# Altium PCB call-2014-06.PcbDoc (part 1 of 2)
Units mm, origin at the board's own origin, x right, y up, seen from the top; angles counter-clockwise.
Board outline 60 x 92 mm, 2 copper layers (Top Layer, Bottom Layer); 65 components, 45 nets, 265 pads, 33 vias.
Unrouted connection lines stored in the file: 15.
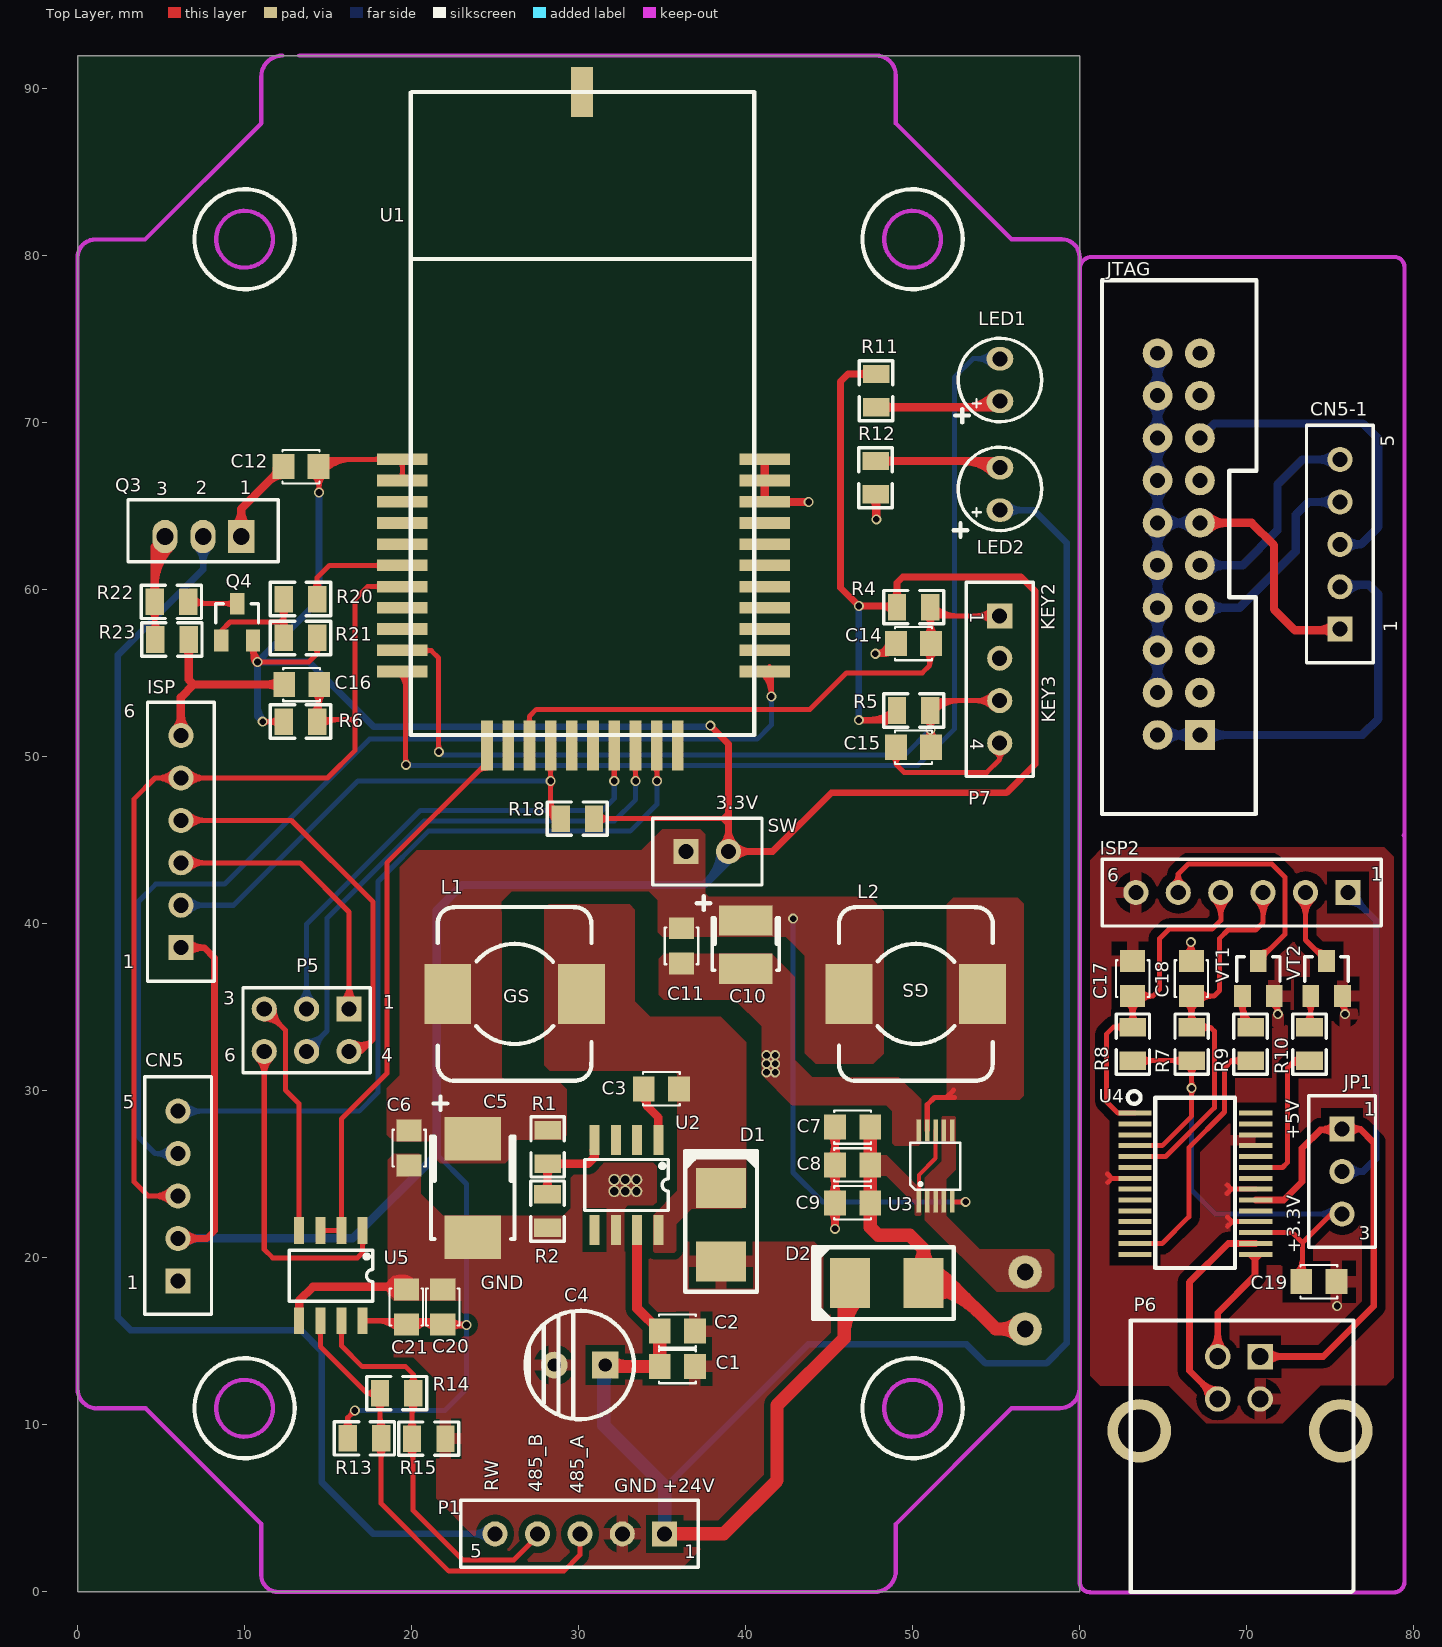
[diagram p0: Top Layer view]
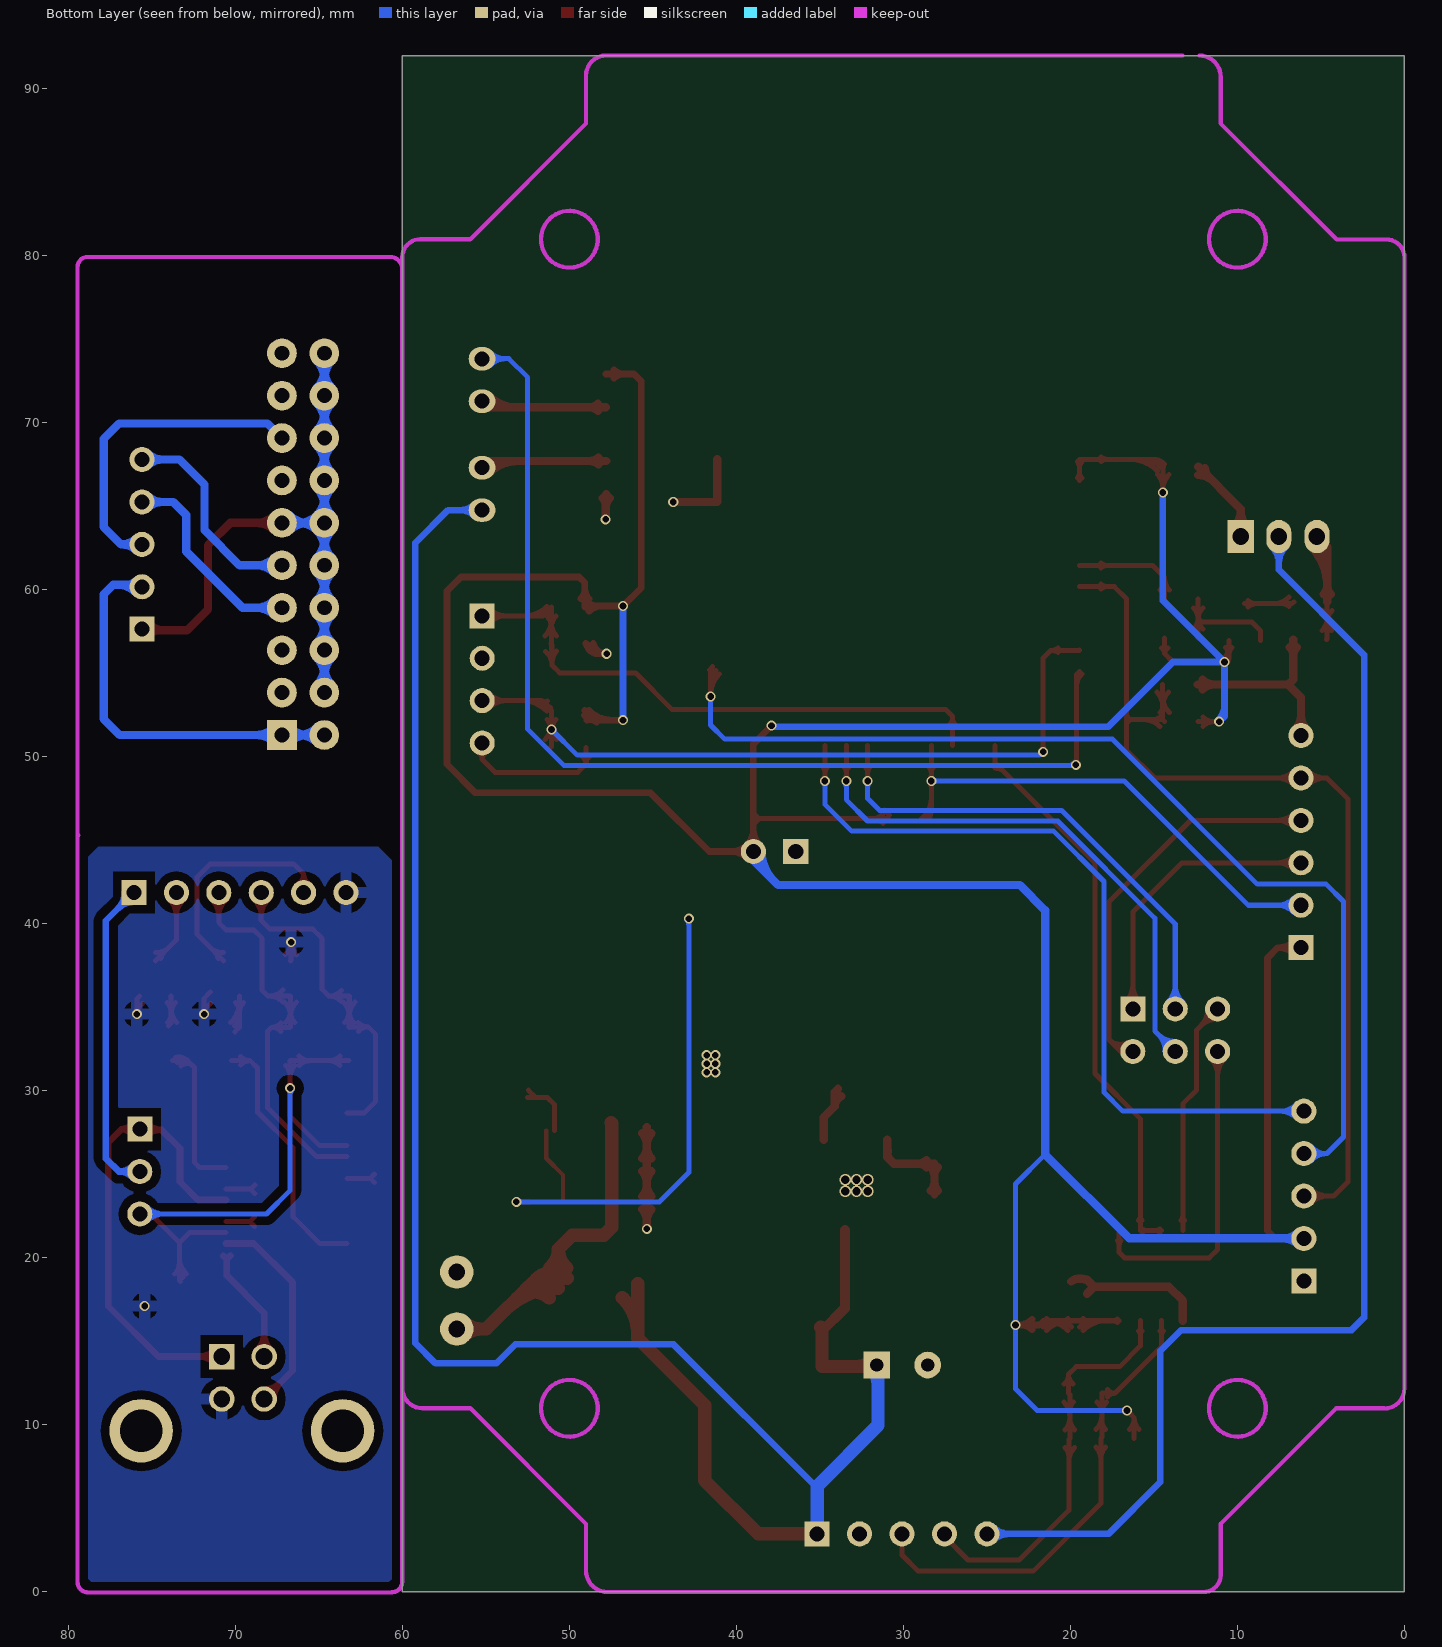
[diagram p1: Bottom Layer view, seen from below]

## Layer stack, top to bottom
Top Solder: solder mask 0.0102, Solder Resist, Dk 3.5
Top Layer: signal copper 0.0356
Dielectric1: dielectric 0.32, FR-4, Dk 4.8
Bottom Layer: signal copper 0.0356
Bottom Solder: solder mask 0.0102, Solder Resist, Dk 3.5

## Board outline
0,0 60,0 60,92 0,92

## Design rules (kind name [scope] priority, off if disabled: settings)
Clearance [All] p1: gap=0.2
FabricationTestPointUsage TestPointUsage [All] p1: valid=0 allowmultiple=FALSE
FabricationTestpoint Testpoint [All] p1: side=3 testpointundercomponent=TRUE minsize=1.016 maxsize=2.54 preferedsize=1.524 minholesize=0 maxholesize=1.016 preferedholesize=0.813 testpointgrid=0.025 allowsidetop=TRUE allowsidebottom=TRUE usegrid=TRUE gridtolerance=0
PolygonConnect [All] p1: connectstyle=Relief reliefconductorwidth=0.7 reliefentries=4 polygonreliefangle="90 Angle" airgapwidth=0.254
RoutingVias [All] p1: holewidth=0.711 width=1.27 viastyle="Through Hole" minholewidth=0.711 minwidth=1.27 maxholewidth=0.711 maxwidth=1.27
SolderMaskExpansion [All] p1: expansion=0.102
Width [All] p1: maxlimit=2 minlimit=0.2 preferedwidth=0.3 minimp=50.000000 maximp=50.000000 favimp=50.000000
27 further rules are at their usual default settings.

## Components (designator, comment, footprint, x,y, rotation, side; value= is the part's Value field where it differs from the comment)
C1 "4.7μF/10%/0805" C-0805 37.62,14.4 r180 top
C2 "4.7μF/10%/0805" C-0805 37.62,16.52 r180 top
C3 "0.01μF/10%/0805" C-0805 33.26,29.23 r0 top
C4 "220μF" CZ3.0/6.5 30.07,13.59 r0 top
C5 "476C" C-TAN-D 21.17,28.43 r270 top
C6 "0.1μf/10%/0805" C-0805 20.75,24.88 r90 top
C7 "4.7μF/10%/0805" C-0805 44.71,26.94 r0 top
C8 "4.7μF/10%/0805" C-0805 44.71,24.67 r0 top
C9 "4.7μF/10%/0805" C-0805 44.71,22.4 r0 top
C10 "47uF/20%/10V/B" C-TAN-B 38.015,41.118 r270 top
C11 "0.1μf/10%/0805" C-0805 37.065,36.988 r90 top
C12 "0.1uf/10%/0805" C-0805 11.684,66.481 r0 top
C14 "0.1uf/10%/0805" C-0805 48.36,55.89 r0 top
C15 "0.1uf/10%/0805" C-0805 48.36,49.68 r0 top
C16 "0.1uf/10%/0805" C-0805 11.72,53.436 r0 top
C17 "100pf/10%/0805" C-0805 62.28,38.43 r270 top
C18 "100pf/10%/0805" C-0805 65.797,38.43 r270 top
C19 "0.1μf/10%/0805" C-0805 76.03,19.48 r180 top
C20 "0.1uf/10%/0805" C-0805 20.97,18.76 r270 top
C21 "1uf/10%/0805" C-0805 18.79,18.76 r270 top
CN5 "1*5/排针" PIN-S-2.54-1*5 6.02,18.63 r90 top
CN5-1 "1*5/排针座" PIN-S-2.54-1*5 75.59,57.65 r90 top
D1 "SMB" SMB 40.63,18.48 r90 top
D2 "1N5408/SMB" smb 51.96,20.59 r180 top
ISP "1*6/排针" PIN-S-2.54-1*6 6.19,38.58 r90 top
ISP2 "1*6/排针座" PIN-S-2.54-1*6 76.07,41.88 r180 top locked
JP1 "1*3/排针" PIN-S-2.54-1*3 75.72,27.71 r270 top
JTAG "2*10/排针" IDC-20 67.21,51.29 r90 top
L1 "15μH" GSDS104C2 26.17,35.81 r270 top
L2 "15μH" GSDS104C2 50.196,35.81 r270 top
LED1 "green LED" LED-φ3 55.23,72.57 r90 top
LED2 "VDD33" LED-φ3 55.23,66.05 r90 top
P1 "1*5/2.5" PIN-S-2.54-1*5 35.16,3.48 r180 top locked
P5 "2*3/排针" HDR2X3_CEN 16.26,34.91 r180 top
P6 "Header1*4" USB_B_90D 70.84,14.12 r270 top locked
P7 "1*4/2.54排针" PIN-S-2.54-1*4 55.22,58.45 r270 top (schematic designator P6)
Q3 "D882/TO-126" TO-126 7.52,63.199 r180 top
Q4 "MMBT3906LT1G/SOT-23" SOT-23 8.23,56.34 r0 top
R1 "10K" R-0805 29.05,25.15 r90 top
R2 "5.9K/1%/0805" R-0805 27.24,24.31 r270 top
R4 "10K/5%/0805" R-0805 51.57,59.87 r180 top
R5 "10K/5%/0805" R-0805 51.57,53.68 r180 top
R6 "10K/5%/0805" R-0805 14.851,53.016 r180 top
R7 "3.3K/5%/0805" R-0805 65.817,34.31 r270 top
R8 "3.3K/5%/0805" R-0805 62.29,34.31 r270 top
R9 "1K/5%/0805" R-0805 69.343,34.31 r270 top
R10 "1K/5%/0805" R-0805 72.87,34.31 r270 top
R11 "3.3K/5%/0805" R-0805 46.92,73.43 r270 top
R12 "1.5K/5%/0805" R-0805 48.69,65.22 r90 top
R13 "3.3K/5%/0805" R-0805 18.68,10.1 r180 top
R14 "120ohm" R-0805 20.61,12.8 r180 top
R15 "3.3K/5%/0805" R-0805 22.53,10.08 r180 top
R18 "10K/5%/0805" R-0805 28.425,45.404 r0 top
R20 "1K/5%/0805" R-0805 11.851,58.55 r0 top
R21 "10K/5%/0805" R-0805 11.851,56.23 r0 top
R22 "1K/5%/0805" R-0805 4.12,58.39 r0 top
R23 "10K/5%/0805" R-0805 7.15,57.93 r180 top
SW "SW-1" PIN-S-2.54-1*2 36.444,44.335 r0 top
U1 "STM32W_1" STM32W108-3 40.52,51.31 r90 top locked
U2 "TPS5430" SO-G8#1 32.86,24.37 r180 top locked
U3 "TPS62056" MSOP-10 50.38,23.46 r0 top locked
U4 "FT232R" SSOP-28 63.32,28.67 r0 top
U5 "MAX3485CSA" SO-G8#2 15.16,18.94 r180 top
VT1 "2N3904" SOT23-3 69.753,35.68 r0 top
VT2 "2N3904" SOT23-3 73.84,35.68 r0 top

## Footprints (in the part's own frame and the unit in brackets; to place one, negate y for a bottom-side part, rotate by r counter-clockwise, add the part's x,y. Pads: shape width x height; smd on the part's side, far side on the other; paste and mask are expansions set on the pad)
C-0805 [mm]
  rect 1.3x1.5 smd: 1(0.65,0.9) 2(2.75,0.9)
  silkscreen extent 0.6,-0.1 2.8,1.9
C-TAN-B [mm]
  rect 1.8x3.2 smd: 1(0.9,2) 2(3.8,2)
  silkscreen extent 0.75,0 3.9,4
C-TAN-D [mm]
  rect 2.6x3.4 smd: 1(1.3,2.5) 2(7.2,2.5)
  silkscreen extent 1.15,0 7.3,5
CZ3.0/6.5 [mm]
  rect 1.6x1.6 hole 0.8: 1(1.524,0)
  round 1.6 hole 0.8: 2(-1.524,0)
  silkscreen extent -3.25,-3.25 3.25,3.25
GSDS104C2 [mm]
  rect 3.6x2.8 smd: 1(0,4) 2(0,-4)
  silkscreen extent -5.2,-4.6 5.21,4.6
HDR2X3_CEN [mm] "Connector; Header; 3x2 Position"
  rect 1.5x1.5 hole 0.9: 1(0,0)
  round 1.5 hole 0.9: 2(2.54,0) 3(5.08,0) 4(0,2.54) 5(2.54,2.54) 6(5.08,2.54)
  silkscreen extent -1.27,-1.27 6.35,3.81
IDC-20 [mil]
  rect 70x70 hole 35: 1(1,0)
  round 70 hole 35: 2(1,100) 3(101,0) 4(101,100) 5(201,0) 6(201,100) 7(301,0) 8(301,100) 9(401,0) 10(401,100) 11(501,0) 12(501,100) 13(601,0) 14(601,100) 15(701,0) 16(701,100) 17(801,0) 18(801,100) 19(901,0) 20(901,100)
  silkscreen extent -185,-133 1073,231
LED-φ3 [mm]
  oval 1.4x1.6 hole 0.9: 1(-1.27,0) 2(1.27,0)
  silkscreen extent -2.5,-2.5 2.5,2.5
MSOP-10 [mm]
  rect 0.27x1.3 smd mask+0.05: 1(0,-0.1) 2(0.5,-0.1) 3(1,-0.1) 4(1.5,-0.1) 5(2,-0.1) 6(2,4.175) 7(1.5,4.175) 8(1,4.175) 9(0.5,4.175) 10(0,4.175)
  silkscreen extent -0.51,0.64 2.46,3.43
PIN-S-2.54-1*2 [mm]
  rect 1.5x1.5 hole 0.9: 1(0,0)
  round 1.5 hole 0.9: 2(2.54,0)
  silkscreen extent -2,-2 4.54,2
PIN-S-2.54-1*3 [mm]
  rect 1.5x1.5 hole 0.9: 1(0,0)
  round 1.5 hole 0.9: 2(2.54,0) 3(5.08,0)
  silkscreen extent -2,-2 7.08,2
PIN-S-2.54-1*4 [mm]
  rect 1.5x1.5 hole 0.9: 1(0,0)
  round 1.5 hole 0.9: 2(2.54,0) 3(5.08,0) 4(7.62,0)
  silkscreen extent -2,-2 9.62,2
PIN-S-2.54-1*5 [mm]
  rect 1.5x1.5 hole 0.9: 1(0,0)
  round 1.5 hole 0.9: 2(2.54,0) 3(5.08,0) 4(7.62,0) 5(10.16,0)
  silkscreen extent -2,-2 12.22,2
PIN-S-2.54-1*6 [mm]
  rect 1.5x1.5 hole 0.9: 1(0,0)
  round 1.5 hole 0.9: 2(2.54,0) 3(5.08,0) 4(7.62,0) 5(10.16,0) 6(12.7,0)
  silkscreen extent -2,-2 14.7,2
R-0805 [mm]
  rect 1.1x1.6 smd: 1(0.5,0.9) 2(2.5,0.9)
  silkscreen extent -0.3,-0.1 3.3,1.9
SMB [mm]
  rect 2.4x3 smd: 1(1.3,2.1) 2(5.7,2.1)
  silkscreen extent -0.51,-0.05 7.92,4.24
smb [mm]
  rect 2.4x3 smd: 1(1.3,2.1) 2(5.7,2.1)
  silkscreen extent -0.51,-0.05 7.92,4.24
SO-G8#1 [mm]
  rect 0.6x1.8 smd: 1(-1.916,-2.7) 2(-0.646,-2.7) 3(0.624,-2.7) 4(1.894,-2.7) 5(1.894,2.7) 6(0.624,2.7) 7(-0.646,2.7) 8(-1.916,2.7)
  silkscreen extent -2.51,-1.52 2.49,1.52
SO-G8#2 [mm]
  rect 0.6x1.6 smd: 1(-1.916,-2.7) 2(-0.646,-2.7) 3(0.624,-2.7) 4(1.894,-2.7) 5(1.894,2.7) 6(0.624,2.7) 7(-0.646,2.7) 8(-1.916,2.7)
  silkscreen extent -2.51,-1.52 2.49,1.52
SOT23-3 [mm]
  rect 1x1.3 smd: 1(0,0) 2(1.9,0) 3(0.95,2.1)
  silkscreen extent -0.35,0.87 2.25,2.35
SOT-23 [mm]
  rect 0.85x1.3 smd: 1(0.381,0.635) 2(2.281,0.635) 3(1.331,2.835)
  silkscreen extent 0.06,1.68 2.61,2.83
SSOP-28 [mm]
  rect 2x0.3 smd: 1(0,0) 2(0,-0.65) 3(0,-1.3) 4(0,-1.95) 5(0,-2.6) 6(0,-3.25) 7(0,-3.9) 8(0,-4.55) 9(0,-5.2) 10(0,-5.85) 11(0,-6.5) 12(0,-7.15) 13(0,-7.8) 14(0,-8.45) 15(7.239,-8.45) 16(7.239,-7.8) 17(7.239,-7.15) 18(7.239,-6.5) 19(7.239,-5.85) 20(7.239,-5.2) 21(7.239,-4.55) 22(7.239,-3.9) 23(7.239,-3.25) 24(7.239,-2.6) 25(7.239,-1.95) 26(7.239,-1.3) 27(7.239,-0.65) 28(7.239,0)
  silkscreen extent -0.43,-9.27 5.99,1.32
STM32W108-3 [mm]
  rect 0.7x3 smd: 1(16.51,21.074) 2(15.24,21.074) 3(13.97,21.074) 4(12.7,21.074) 5(11.43,21.074) 6(10.16,21.074) 7(8.89,21.074) 8(7.62,21.074) 9(6.35,21.074) 10(5.08,21.074) 11(3.81,21.074) 22(3.81,-0.627) 23(5.08,-0.627) 24(6.35,-0.627) 25(7.62,-0.627) 26(8.89,-0.627) 27(10.16,-0.627) 28(11.43,-0.627) 29(12.7,-0.627) 30(13.97,-0.627) 31(15.24,-0.627) 32(16.51,-0.627)
  rect 3x0.7 smd: 12(-0.627,16.002) 13(-0.627,14.732) 14(-0.627,13.462) 15(-0.627,12.192) 16(-0.627,10.922) 17(-0.627,9.652) 18(-0.627,8.382) 19(-0.627,7.112) 20(-0.627,5.842) 21(-0.627,4.572)
  rect 3x1.3 smd: ""(38.5,10.314)
  silkscreen extent 0,0 38.5,20.57
TO-126 [mm]
  rect 1.6x2 hole 1: 1(-2.28,0)
  oval 1.5x2 hole 1: 2(0,0) 3(2.28,0)
  silkscreen extent -4.5,-2.2 4.5,1.5
USB_B_90D [mil] "180度 横插 方口USB母座"
  rect 60.06x60.06 hole 40: 1(1,-1)
  round 60.06 hole 40: 2(1,-101) 3(101,-101) 4(101,-1)
  round 150 hole 100: 5(176,-286) 6(176,189)
  silkscreen extent -84,-306 556,219

## Part data
C1 C2 C3 C6 C7 C8 C9 C11 C12 C14 C15 C16 C17 C18 C19 C20 C21: library part Cap, "Capacitor"
C4 C5: library part "Cap Pol1", "Polarized Capacitor (Radial)"
C10: library part ASC-0013BA
CN5 CN5-1: library part Header1*5
D1 D2: library part "Diode 1N5408", "3 Amp Medium Power Silicon Rectifier Diode"
ISP ISP2: library part Header1*6
JP1: library part Header1*3
JTAG: library part Header2*10
L1 L2: library part Inductor, "Inductor"
LED1: library part LED
LED2: library part LED3, "Typical BLUE SiC LED"
P1 P6 P7: library part "Header 4", "Header, 4-Pin"
P5: library part "Header 3X2A", "Header, 3-Pin, Dual row"
Q3: library part NPN-1E2C3B
Q4: library part ASQ-0009BA
R1 R2 R4 R5 R6 R12 R18: library part Res2, "Resistor"
R7 R8: library part RES_1
R9 R10 R11 R13 R14 R15 R20 R21 R22 R23: library part RES, "R"
U1: library part STM32W108-3
U5: library part MAX485CSA, "Low-Power, Slew-Rate-Limited RS-485/RS-422 Transceiver"
VT1 VT2: library part NPN, "NPN Transistor"

## Free pads (board coordinates)
  round 0.7 hole 0.5: 0(32.137,23.996) 0(32.137,24.683) 1(32.804,23.996) 1(32.804,24.683) 2(33.472,23.996) 2(33.472,24.683)
  round 2 hole 1: 0(56.74,15.75) 1(56.74,19.16)

## Via types
v1: diameter 0.6, hole 0.4, Top Layer to Bottom Layer, 33 vias

## Nets (pads, with @x,y where several pads share a name; then routed paths per layer and width w, separated by ;. In a path a pad name is that pad's centre, name@x,y a point inside that pad or via, vN(x,y) a via of type N, cw(c..) or ccw(c..) an arc to the next point about the centre after c; other vN are vias at no path point)
485_A: P1.3 R13.1 R14.2 U5.6 | length 34.3
  Top Layer w0.3: U5.6@14.43,15.634 cw(c14.174,15.378) 14.536,15.378 cw(c14.898,15.378) U5.6@14.642,15.634 ; U5.6@14.536,16.24 14.536,14.694 17.33,11.9 ; R14.2@17.785,11.667 ccw(c17.33,11.34) 17.33,11.9 ; R14.2@17.785,12.133 cw(c17.33,12.46) 17.33,11.9 ; R14.2@17.827,11.367 cw(c17.144,10.684) 18.11,10.684 cw(c19.076,10.684) R14.2@18.393,11.367 ; R13.1@17.897,8.667 cw(c17.214,7.984) 18.18,7.984 cw(c19.146,7.984) R13.1@18.463,8.667 ; R13.1@17.897,9.733 ccw(c17.383,10.247) 18.11,10.247 ; 18.11,10.585 ccw(c19.315,10.585) R13.1@18.463,9.733 ; P1.3@30.08,3.48 30.08,2.21 29.116,1.246 22.23,1.246 18.18,5.296 R13.1@18.18,9.2 18.11,9.27 R14.2@18.11,11.9 17.33,11.9
485_B: P1.4 R14.1 R15.2 U5.7 | length 30.6
  Top Layer w0.3: U5.7@15.7,15.634 cw(c15.444,15.378) 15.806,15.378 cw(c16.168,15.378) U5.7@15.912,15.634 ; U5.7@15.806,16.24 15.806,14.734 17.05,13.49 19.65,13.49 20.11,13.03 ; R15.2@19.747,8.647 cw(c18.919,7.819) 20.09,7.819 ; R15.2@19.747,9.713 ccw(c19.064,10.396) 20.03,10.396 ccw(c20.996,10.396) R15.2@20.313,9.713 ; R14.1@19.827,11.367 cw(c19.337,10.877) 20.03,10.877 ; R14.1@19.847,12.451 ccw(c19.342,13.03) 20.11,13.03 ; 20.03,10.491 cw(c21.269,10.491) R14.1@20.393,11.367 ; 20.09,8.109 cw(c20.851,8.109) R15.2@20.313,8.647 ; R14.1@20.373,12.451 cw(c20.878,13.03) 20.11,13.03 ; P1.4@27.54,3.48 27.54,3.328 26.125,1.913 23.07,1.913 20.09,4.893 20.09,9.12 R15.2@20.03,9.18 20.03,11.82 R14.1@20.11,11.9 20.11,13.03
+VBRD: CN5-1.2 JTAG.1 JTAG.2 | length 32.8
  Bottom Layer w0.5: JTAG.2@64.67,51.315 76.925,51.315 77.89,52.28 77.89,59.74 77.31,60.32 75.72,60.32 CN5-1.2@75.59,60.19 ; JTAG.2@65.122,50.864 cw(c66.213,49.773) 66.213,51.315 cw(c66.213,52.858) JTAG.2@65.122,51.767 ; JTAG.1@66.758,50.864 ccw(c65.667,49.773) 65.667,51.315 ccw(c65.667,52.858) JTAG.1@66.758,51.767 ; JTAG.1@67.662,50.864 cw(c68.753,49.773) 68.753,51.315 cw(c68.753,52.858) JTAG.1@67.662,51.767 ; CN5-1.2@75.944,59.836 cw(c77.111,58.669) 77.111,60.32 ; CN5-1.2@75.944,60.544 ccw(c76.483,61.083) 76.483,60.32
/RESET: C16.2 CN5-1.3 CN5.3 ISP2.5 ISP.5 JTAG.15 R6.1 U1.7 VT1.3 | length 107.7
  Top Layer w0.3: CN5.3@5.596,23.286 ccw(c4.571,22.261) 4.571,23.71 ccw(c4.571,25.159) CN5.3@5.596,24.134 ; ISP.5@5.766,48.316 ccw(c4.741,47.291) 4.741,48.74 ccw(c4.741,50.189) ISP.5@5.766,49.164 ; CN5.3@6.02,23.71 4.23,23.71 3.39,24.55 3.39,47.49 4.64,48.74 14.967,48.74 16.628,50.401 16.628,59.461 17.367,60.2 U1.7@19.446,60.2 ; ISP.5@6.614,48.316 cw(c7.639,47.291) 7.639,48.74 cw(c7.639,50.189) ISP.5@6.614,49.164 ; R6.1@14.068,52.649 ccw(c13.098,53.619) C16.2@14.47,53.619 ; C16.2@14.116,53.882 cw(c13.263,53.029) 14.47,53.029 cw(c15.677,53.029) C16.2@14.824,53.882 ; R6.1@14.351,52.116 R6.1@14.47,52.235 ; 14.47,53.044 ccw(c15.029,53.044) R6.1@14.634,52.649 ; C16.2@14.47,54.336 R6.1@14.47,52.235 ; R6.1@14.634,51.833 cw(c15.604,50.863) 15.604,52.235 ; R6.1@14.634,52.399 ccw(c15.029,52.794) 15.029,52.235 ; 16.628,52.019 16.412,52.235 ; 16.628,52.451 16.412,52.235 ; U1.7@18.155,60.059 ccw(c17.813,59.717) 17.813,60.2 ccw(c17.813,60.683) U1.7@18.155,60.341 ; ISP2.5@65.581,42.382 ccw(c65.183,42.99) 65.91,42.99 ; ISP2.5@65.91,41.88 65.91,42.99 ; ISP2.5@66.239,42.382 cw(c66.637,42.99) 65.91,42.99 ; VT1.3@70.703,37.78 72.29,39.367 72.29,42.81 71.51,43.59 66.51,43.59 65.91,42.99 ; VT1.3@70.703,38.28 ccw(c70.703,39.487) 71.556,38.634 ; VT1.3@71.053,37.93 cw(c71.536,37.93) VT1.3@71.194,38.271 ; R6.1@14.47,52.235 16.412,52.235
  Bottom Layer w0.5: JTAG.15@67.21,69.095 68.085,69.97 76.96,69.97 77.89,69.04 77.89,63.78 76.84,62.73 CN5-1.3@75.59,62.73 ; CN5-1.3@75.944,62.376 cw(c76.797,61.523) 76.797,62.73 cw(c76.797,63.937) CN5-1.3@75.944,63.084
BOOT: ISP2.2 ISP.2 R18.1 U1.15 VT2.3 | length 44.7
  Top Layer w0.3: U1.15@28.187,49.392 cw(c27.845,49.05) 28.328,49.05 cw(c28.811,49.05) U1.15@28.469,49.392 ; v1@28.222,48.453 cw(c27.966,48.197) 28.328,48.197 cw(c28.69,48.197) v1@28.434,48.453 ; v1@28.222,48.665 ccw(c27.966,48.921) 28.328,48.921 ccw(c28.69,48.921) v1@28.434,48.665 ; 28.328,46.788 ccw(c29.159,46.788) R18.1@28.571,46.2 ; 28.328,47.512 ccw(c29.883,47.512) R18.1@28.784,46.413 ; U1.15@28.328,50.683 28.328,46.901 R18.1@28.925,46.304 ; ISP2.2@73.106,41.456 cw(c72.081,40.431) 73.53,40.431 cw(c74.979,40.431) ISP2.2@73.954,41.456 ; ISP2.2@73.53,41.88 73.53,39.04 VT2.3@74.79,37.78 ; 73.936,38.634 ccw(c74.79,39.487) VT2.3@74.79,38.28 ; VT2.3@74.299,38.271 cw(c73.957,37.93) VT2.3@74.44,37.93
  Bottom Layer w0.3: ISP.2@6.19,41.12 9.342,41.12 16.781,48.559 v1(28.328,48.559) ; ISP.2@6.614,40.696 cw(c7.639,39.671) 7.639,41.12 cw(c7.639,42.569) ISP.2@6.614,41.544 ; v1@28.222,48.453 ccw(c27.966,48.197) 27.966,48.559 ccw(c27.966,48.921) v1@28.222,48.665
CBUS0: R10.2 U4.23 | length 13.5
  Top Layer w0.3: U4.23@70.559,25.42 72.15,25.42 72.44,25.71 72.44,31.4 72.85,31.81 ; 72.476,31.436 cw(c73.228,30.684) R10.2@73.495,31.713 ; 72.515,31.475 cw(c72.904,31.086) R10.2@73.261,31.505 ; 72.745,31.705 cw(c73.116,31.334) R10.2@73.455,31.734 ; 72.847,31.807 cw(c73.381,31.273) R10.2@73.57,32.004 ; R10.2@73.168,31.62 ccw(c72.85,31.449) 72.85,31.81 ; R10.2@73.168,32 cw(c72.85,32.171) 72.85,31.81 ; R10.2@73.77,31.81 72.85,31.81
CBUS2: R9.2 U4.13 | length 16.7
  Top Layer w0.3: U4.13@63.32,20.87 64.95,20.87 66.54,22.46 66.54,26.606 68.678,28.744 68.678,31.378 69.11,31.81 ; R9.2@69.693,31.546 ccw(c69.11,31.035) 69.11,31.81 ; R9.2@69.693,32.074 cw(c69.11,32.585) 69.11,31.81 ; R9.2@70.243,31.81 69.11,31.81
D+: P6.2 U4.15 | length 9.5
  Top Layer w0.4: P6.2@67.877,14.492 ccw(c66.916,15.453) 68.275,15.453 ccw(c69.633,15.453) P6.2@68.672,14.492 ; P6.2@68.275,14.095 68.275,16.715 70.51,18.95 70.51,19.92 ; U4.15@70.29,20.14 70.51,19.92 ; U4.15@70.73,20.14 70.51,19.92
D-: P6.3 U4.16 | length 14.8
  Top Layer w0.4: P6.3@67.712,11.555 ccw(c66.353,11.555) 67.314,12.515 ccw(c68.275,13.476) P6.3@68.275,12.117 ; P6.3@68.275,11.555 66.58,13.249 66.58,18.55 68.9,20.87 U4.16@70.559,20.87
GND: C1.1 C2.1 C4.2 C5.2 C6.1 C7.1 C8.1 C9.1 C10.2 C11.1 C12.1 C14.1 C15.1 C16.1 C17.1 C18.1 C19.1 C20.1 C21.1 CN5.1 D1.1 ISP2.6 ISP.6 P1.2 P6.4 P7.2 P7.4 pad.0@32.137,23.996 pad.0@32.137,24.683 pad.1 pad.2 Q3.1 R2.2 R12.1 R15.1 R23.1 U1.30 U1.31 U1.32 U2.6 U3.2 U3.3 U3.4 U3.6 U3.7 U3.10 U4.7 U4.18 U4.21 U4.25 U4.26 U5.5 VT1.2 VT2.2 | length 85.6
  Top Layer w0.3: C15.1@48.74,50.059 cw(c48.421,49.564) 49.01,49.564 ; C15.1@49.01,50.58 49.01,49.564 ; C15.1@49.28,50.059 ccw(c49.599,49.564) 49.01,49.564 ; P7.4@54.947,50.296 cw(c54.72,49.85) 55.22,49.85 ; P7.4@55.22,50.83 55.22,49.85 ; P7.4@55.493,50.296 ccw(c55.72,49.85) 55.22,49.85 ; 61.67,24.51 61.93,24.77 ; 61.67,25.03 61.93,24.77 ; U4.7@63.32,24.77 61.93,24.77 ; C18.1@66.344,38.134 ccw(c65.58,38.897) v1@66.66,38.897 ; v1@66.554,38.804 cw(c66.298,38.548) 66.66,38.548 cw(c67.022,38.548) v1@66.766,38.804 ; C18.1@66.697,37.78 66.66,37.817 v1(66.66,38.91) ccw(c67.617,38.91) C18.1@67.013,38.168 ; 68.83,23.86 69.09,24.12 ; 68.83,24.38 69.09,24.12 ; 68.85,21.88 69.14,22.17 ; 68.85,22.46 69.14,22.17 ; U4.18@70.559,22.17 69.14,22.17 ; U4.21@70.559,24.12 69.09,24.12 ; VT1.2@71.485,35.223 cw(c71.132,34.575) v1@71.87,34.575 ; VT1.2@71.5,35.92 71.87,35.55 v1(71.87,34.6) ; v1@71.764,34.706 ccw(c71.508,34.962) 71.87,34.962 ccw(c72.232,34.962) v1@71.976,34.706 ; VT2.2@75.548,35.237 cw(c75.122,34.586) v1@75.9,34.586 ; VT2.2@75.74,35.68 75.9,35.52 v1(75.9,34.6) ; v1@75.794,34.706 ccw(c75.538,34.962) 75.9,34.962 ccw(c76.262,34.962) v1@76.006,34.706 ; 49.01,49.564 49.492,49.082 54.452,49.082 55.22,49.85
  Top Layer w0.4: 48.286,56.179 ccw(c48.286,56.876) C14.1@48.962,56.702 ; C14.1@48.574,56.802 cw(c47.77,57.009) v1(47.77,56.179) 48.399,56.179 C14.1@49.01,56.79
  Top Layer w0.5: ISP.6@5.836,51.634 ccw(c4.983,52.487) 6.19,52.487 ccw(c7.397,52.487) ISP.6@6.544,51.634 ; ISP.6@6.19,51.28 6.19,53.571 6.955,54.336 ; R23.1@6.438,56.568 cw(c5.926,56.056) 6.65,56.056 cw(c7.374,56.056) R23.1@6.862,56.568 ; R23.1@6.65,57.03 6.65,54.641 6.955,54.336 ; Q3.1@9.411,63.788 ccw(c8.472,64.727) 9.8,64.727 ccw(c11.128,64.727) Q3.1@10.189,63.788 ; Q3.1@9.8,63.199 9.8,64.847 C12.1@12.334,67.381 ; 11.48,66.527 cw(c12.334,65.674) C12.1@12.334,66.881 ; C12.1@11.722,66.769 ccw(c11.21,67.281) C12.1@11.934,67.281 ; C16.1@12.087,54.053 ccw(c11.404,53.37) 11.404,54.336 ccw(c11.404,55.302) C16.1@12.087,54.619 ; C16.1@12.37,54.336 6.955,54.336 ; U5.5@13.266,16.24 13.266,17.446 14.094,18.274 18.57,18.274 C21.1@18.989,18.693 ; 18.588,18.275 C21.1@19.007,17.856 ; 18.802,18.506 cw(c19.425,17.884) C21.1@19.945,18.594 ; U1.32@41.147,67.833 U1.30@41.147,65.28 41.161,65.266 v1(43.779,65.266) ; C9.1@45.077,22.917 cw(c44.394,22.234) 45.36,22.234 cw(c46.326,22.234) C9.1@45.643,22.917 ; C9.1@45.077,23.683 ccw(c44.394,24.366) 45.36,24.366 ccw(c46.326,24.366) C9.1@45.643,23.683 ; C8.1@45.077,25.187 cw(c44.394,24.504) 45.36,24.504 cw(c46.326,24.504) C8.1@45.643,25.187 ; C8.1@45.077,25.953 ccw(c44.394,26.636) 45.36,26.636 ccw(c46.326,26.636) C8.1@45.643,25.953 ; C7.1@45.077,27.457 cw(c44.394,26.774) 45.36,26.774 cw(c46.326,26.774) C7.1@45.643,27.457 ; v1(45.36,21.742) C7.1@45.36,27.84 ; R12.1@47.578,65.508 cw(c46.976,64.906) 47.827,64.906 ; R12.1@47.79,65.72 47.827,65.683 v1(47.827,64.227) ; 47.827,65.085 cw(c48.425,65.085) R12.1@48.002,65.508
  other v1: 75.43,17.12 41.259,31.118 41.775,31.118 41.259,31.629 41.775,31.629 41.259,32.14 41.775,32.14
GND1: CN5-1.1 JTAG.4 JTAG.6 JTAG.8 JTAG.10 JTAG.11 JTAG.12 JTAG.14 JTAG.16 JTAG.18 JTAG.20 | length 84
  Top Layer w0.5: JTAG.11@67.21,64.015 70.305,64.015 71.64,62.68 71.64,58.84 72.9,57.58 75.52,57.58 CN5-1.1@75.59,57.65 ; JTAG.11@67.662,63.564 cw(c68.753,62.473) 68.753,64.015 cw(c68.753,65.558) JTAG.11@67.662,64.467 ; 74.214,57.58 ccw(c74.214,59.026) CN5-1.1@75.236,58.004 ; 74.552,57.58 cw(c74.552,56.612) CN5-1.1@75.236,57.296
  Bottom Layer w0.5: JTAG.4@64.218,54.307 ccw(c63.127,55.398) 64.67,55.398 ccw(c66.213,55.398) JTAG.4@65.122,54.307 ; JTAG.6@64.218,55.944 cw(c63.127,54.853) 64.67,54.853 cw(c66.213,54.853) JTAG.6@65.122,55.944 ; JTAG.6@64.218,56.847 ccw(c63.127,57.938) 64.67,57.938 ccw(c66.213,57.938) JTAG.6@65.122,56.847 ; JTAG.8@64.218,58.484 cw(c63.127,57.393) 64.67,57.393 cw(c66.213,57.393) JTAG.8@65.122,58.484 ; JTAG.8@64.218,59.387 ccw(c63.127,60.478) 64.67,60.478 ccw(c66.213,60.478) JTAG.8@65.122,59.387 ; JTAG.10@64.218,61.024 cw(c63.127,59.933) 64.67,59.933 cw(c66.213,59.933) JTAG.10@65.122,61.024 ; JTAG.10@64.218,61.927 ccw(c63.127,63.018) 64.67,63.018 ccw(c66.213,63.018) JTAG.10@65.122,61.927 ; JTAG.12@64.218,63.564 cw(c63.127,62.473) 64.67,62.473 cw(c66.213,62.473) 65.122,63.564 cw(c66.213,62.473) 66.213,64.015 cw(c66.213,65.558) 65.122,64.467 cw(c66.213,65.558) 64.67,65.558 cw(c63.127,65.558) JTAG.12@64.218,64.467 ; JTAG.14@64.218,66.104 cw(c63.127,65.013) 64.67,65.013 cw(c66.213,65.013) JTAG.14@65.122,66.104 ; JTAG.14@64.218,67.007 ccw(c63.127,68.098) 64.67,68.098 ccw(c66.213,68.098) JTAG.14@65.122,67.007 ; JTAG.16@64.218,68.644 cw(c63.127,67.553) 64.67,67.553 cw(c66.213,67.553) JTAG.16@65.122,68.644 ; JTAG.16@64.218,69.547 ccw(c63.127,70.638) 64.67,70.638 ccw(c66.213,70.638) JTAG.16@65.122,69.547 ; JTAG.18@64.218,71.184 cw(c63.127,70.093) 64.67,70.093 cw(c66.213,70.093) JTAG.18@65.122,71.184 ; JTAG.18@64.218,72.087 ccw(c63.127,73.178) 64.67,73.178 ccw(c66.213,73.178) JTAG.18@65.122,72.087 ; JTAG.20@64.218,73.724 cw(c63.127,72.633) 64.67,72.633 cw(c66.213,72.633) JTAG.20@65.122,73.724 ; JTAG.4@64.67,53.855 64.67,63.89 64.795,64.015 JTAG.11@67.21,64.015 ; JTAG.12@64.67,64.015 JTAG.20@64.67,74.175 ; JTAG.11@66.758,63.564 ccw(c65.667,62.473) 65.667,64.015 ccw(c65.667,65.558) JTAG.11@66.758,64.467
JNTRST: JTAG.3
JTCK: CN5-1.5 CN5.5 JTAG.9 U1.20 | length 68.3
  Top Layer w0.3: U1.20@34.537,49.392 cw(c34.144,48.999) 34.699,48.999 ; v1@34.593,48.665 ccw(c34.337,48.921) 34.699,48.921 ccw(c35.061,48.921) v1@34.805,48.665 ; U1.20@34.678,50.683 34.699,50.662 v1(34.699,48.559) ; 34.699,49.101 cw(c35.11,49.101) U1.20@34.819,49.392
  Bottom Layer w0.3: CN5.5@6.02,28.79 16.862,28.79 17.987,29.915 17.987,42.541 21.003,45.557 33.089,45.557 34.699,47.167 v1(34.699,48.559) ; CN5.5@6.444,28.366 cw(c7.469,27.341) 7.469,28.79 cw(c7.469,30.239) CN5.5@6.444,29.214 ; v1@34.593,48.453 cw(c34.337,48.197) 34.699,48.197 cw(c35.061,48.197) v1@34.805,48.453
  Bottom Layer w0.5: JTAG.9@67.21,61.475 69.745,61.475 71.85,63.58 71.85,66.31 73.35,67.81 CN5-1.5@75.59,67.81 ; JTAG.9@67.662,61.024 cw(c68.753,59.933) 68.753,61.475 cw(c68.753,63.018) JTAG.9@67.662,61.927 ; CN5-1.5@75.236,67.456 ccw(c74.383,66.603) 74.383,67.81 ccw(c74.383,69.017) CN5-1.5@75.236,68.164
JTDI: JTAG.5
JTDO: JTAG.13
JTMS: CN5-1.4 CN5.4 JTAG.7 U1.22 | length 85
  Top Layer w0.3: U1.22@41.006,54.979 cw(c39.708,53.681) v1@41.543,53.681 ; U1.22@41.218,55.191 cw(c40.432,54.405) 41.543,54.405 ; U1.22@41.43,55.403 cw(c41.157,55.13) U1.22@41.543,55.13 ; v1@41.437,53.722 ccw(c41.181,53.978) 41.543,53.978 ccw(c41.905,53.978) v1@41.649,53.722 ; v1(41.543,53.616) 41.543,55.159 U1.22@41.594,55.21
  Bottom Layer w0.3: CN5.4@5.582,25.84 ccw(c4.638,24.959) 4.638,26.25 ; CN5.4@5.582,26.66 cw(c4.638,27.541) 4.638,26.25 ; CN5.4@6.02,26.25 4.638,26.25 ; v1@41.437,53.51 cw(c41.181,53.254) 41.543,53.254 cw(c41.905,53.254) v1@41.649,53.51 ; v1(41.543,53.616) 41.543,51.912 40.692,51.061 17.481,51.061 8.804,42.384 4.683,42.384 3.649,41.35 3.649,27.239 4.638,26.25
  Bottom Layer w0.5: JTAG.7@67.21,58.935 69.575,58.935 72.94,62.3 72.94,64.49 73.72,65.27 CN5-1.4@75.59,65.27 ; JTAG.7@67.662,58.484 cw(c68.753,57.393) 68.753,58.935 cw(c68.753,60.478) JTAG.7@67.662,59.387 ; CN5-1.4@75.236,64.916 ccw(c74.383,64.063) 74.383,65.27 ccw(c74.383,66.477) CN5-1.4@75.236,65.624
KEY2: C14.2 P7.1 R4.1 U1.14 | length 45.8
  Top Layer w0.3: U1.14@26.917,51.974 ccw(c26.575,52.316) 27.058,52.316 ccw(c27.541,52.316) U1.14@27.199,51.974 ; U1.14@27.058,50.683 27.058,52.435 27.474,52.851 43.86,52.851 46.045,55.036 50.584,55.036 51.028,55.48 51.028,56.708 C14.2@51.11,56.79 ; C14.2@50.756,56.336 cw(c50.101,55.681) 51.028,55.681 ; C14.2@50.756,57.244 ccw(c49.999,58.001) 51.07,58.001 ; R4.1@50.787,58.437 cw(c50.104,57.754) 51.07,57.754 cw(c52.036,57.754) R4.1@51.353,58.437 ; 51.028,55.477 cw(c52.082,55.477) C14.2@51.423,56.3 ; C14.2@51.028,56.392 51.07,56.434 R4.1@51.07,58.97 51.59,58.45 P7.1@55.22,58.45 ; R4.1@51.07,58.194 ccw(c52.414,58.194) C14.2@51.464,57.244 ; R4.1@51.141,58.791 ccw(c51.963,59.613) 51.963,58.45 ; R4.1@51.353,59.003 ccw(c52.688,60.338) 52.688,58.45 ; P7.1@54.796,58.026 ccw(c53.771,57.001) 53.771,58.45 ccw(c53.771,59.899) P7.1@54.796,58.874
KEY3: C15.2 P7.3 R5.1 U1.10 | length 57
  Top Layer w0.3: U1.10@19.446,56.39 19.45,56.394 19.481,56.363 21.186,56.363 21.625,55.924 v1@21.625,50.306 ; U1.10@20.737,56.249 cw(c21.014,55.972) 21.014,56.363 ; U1.10@20.737,56.531 ccw(c21.144,56.938) 21.144,56.363 ; v1@21.526,50.412 ccw(c21.287,50.651) 21.625,50.651 ; 21.625,50.685 ccw(c22.011,50.685) v1@21.738,50.412 ; C15.2@50.756,51.034 ccw(c49.999,51.791) v1@51.07,51.791 ; R5.1@50.787,52.247 cw(c50.104,51.564) 51.07,51.564 cw(c52.036,51.564) R5.1@51.353,52.247 ; v1@50.964,51.541 cw(c50.708,51.285) 51.07,51.285 cw(c51.432,51.285) v1@51.176,51.541 ; v1@50.964,51.753 ccw(c50.708,52.009) 51.07,52.009 ccw(c51.432,52.009) v1@51.176,51.753 ; R5.1@51.07,51.984 ccw(c52.414,51.984) C15.2@51.464,51.034 ; C15.2@51.137,50.553 51.07,50.62 R5.1@51.07,52.78 51.66,53.37 ; R5.1@51.141,52.959 cw(c52.132,51.968) 52.132,53.37 ; R5.1@51.314,53.347 ccw(c51.474,53.556) 51.66,53.37 ; R5.1@51.353,52.747 cw(c52.857,51.243) 52.857,53.37 ; R5.1@51.47,53.03 cw(c51.832,53.03) R5.1@51.576,53.286 ; P7.3@54.796,52.946 ccw(c53.771,51.921) 53.771,53.37 ccw(c53.771,54.819) P7.3@54.796,53.794 ; P7.3@55.22,53.37 51.66,53.37
  Bottom Layer w0.3: v1(21.632,50.306) 21.836,50.102 49.525,50.102 v1(51.07,51.647) ; v1@50.92,51.647 cw(c50.558,51.647) 50.814,51.391 cw(c51.07,51.135) v1@51.07,51.497
NetC3_1: C3.1 U2.1 | length 4.2
  Top Layer w0.5: C3.1@33.73,29.673 cw(c33.426,29.071) 34.1,29.071 ; C3.1@33.91,30.13 34.1,29.94 34.1,29.09 34.776,28.414 U2.1@34.776,27.07
NetC3_2: C3.2 D1.2 L1.1 U2.8
NetC5_1: C5.1 C6.2 C10.1 C11.2 L1.2 L2.2 R1.2 SW.1 U3.5 | length 28.7
  Top Layer w0.3: U3.5@52.417,23.359 v1(53.176,23.359) ; v1@53.07,23.253 ccw(c52.814,22.997) 52.814,23.359 ccw(c52.814,23.721) v1@53.07,23.465
  Bottom Layer w0.3: v1@42.741,40.207 cw(c42.485,39.951) 42.847,39.951 cw(c43.209,39.951) v1@42.953,40.207 ; v1(42.847,40.313) 42.847,25.117 44.605,23.359 v1(53.176,23.359) ; v1@53.07,23.253 ccw(c52.814,22.997) 52.814,23.359 ccw(c52.814,23.721) v1@53.07,23.465
NetISP2_1: ISP2.1 JP1.2 | length 23
  Bottom Layer w0.4: JP1.2@75.72,25.17 76.97,25.17 ; ISP2.1@76.07,41.33 cw(c76.07,40.002) 77.009,40.941 cw(c77.948,41.88) ISP2.1@76.62,41.88 ; ISP2.1@76.07,41.88 77.76,40.19 77.76,25.96 76.97,25.17 ; JP1.2@76.126,24.798 cw(c76.97,24.025) 76.97,25.17 ; JP1.2@76.126,25.542 ccw(c76.97,26.315) 76.97,25.17